# Altium PCB expansionBreakout.PcbDoc
Units mil, origin at the board's own origin, x right, y up, seen from the top; angles counter-clockwise.
Board outline 1140 x 895 mil, 2 copper layers (Top Layer, Bottom Layer); 5 components, 12 nets, 34 pads, 6 vias.
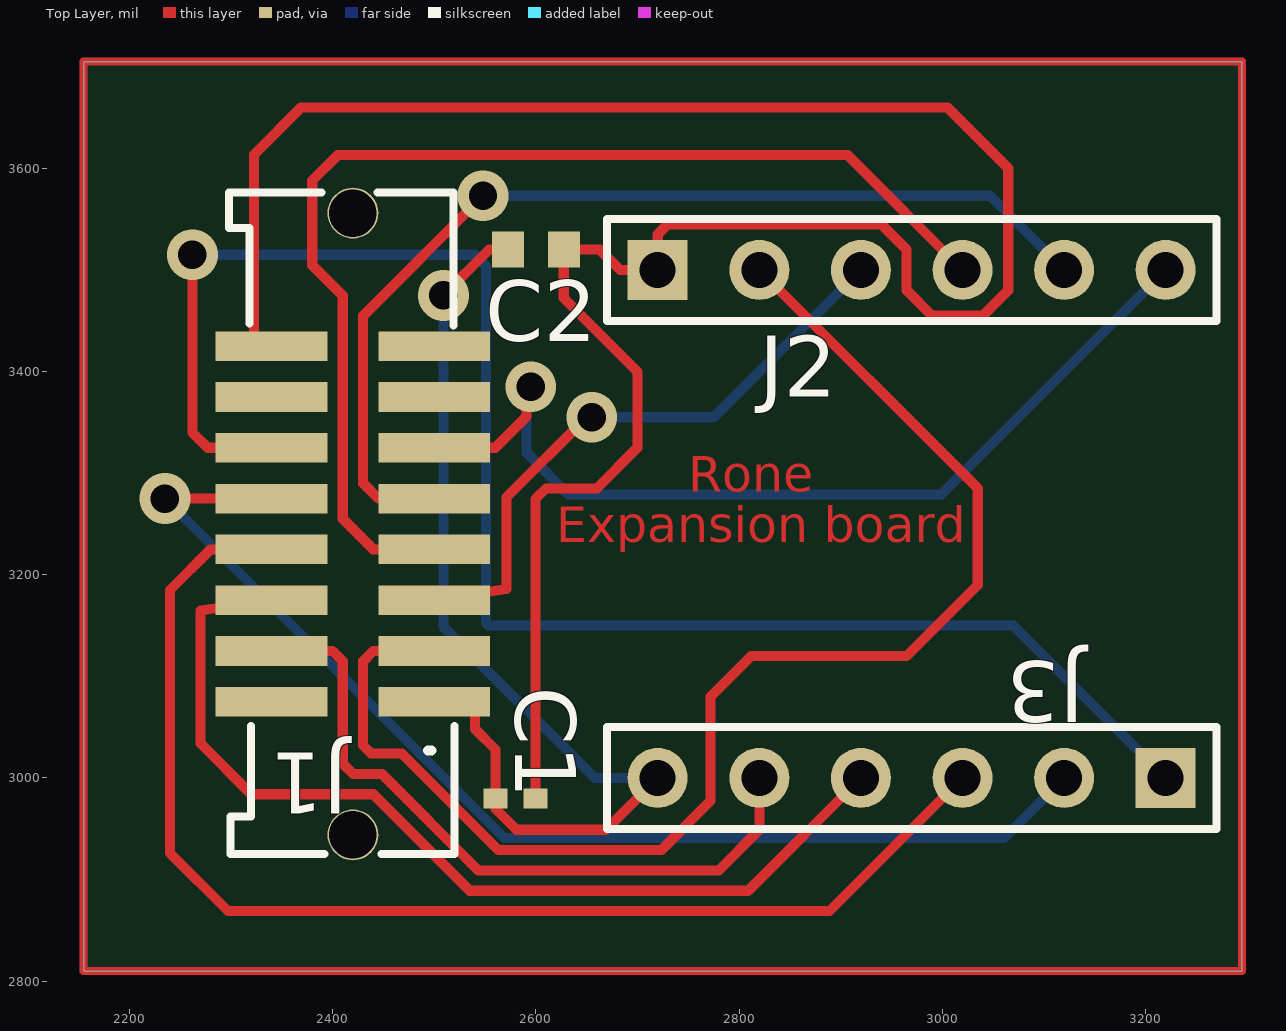
[diagram p0: Top Layer view]
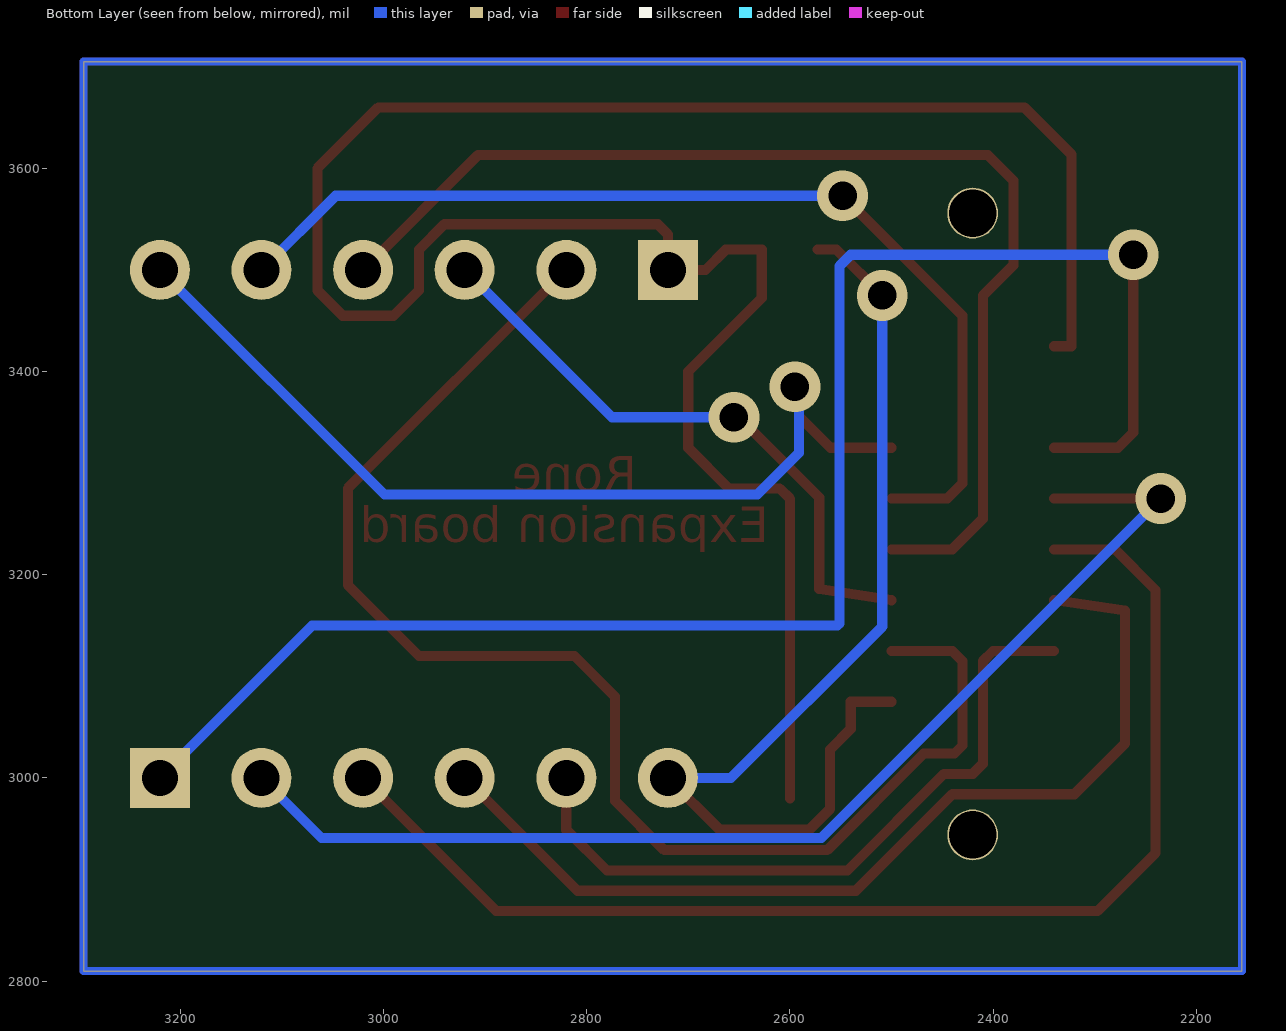
[diagram p1: Bottom Layer view, seen from below]

## Layer stack, top to bottom
Top Layer: signal copper 1.4
Dielectric: dielectric 12.6, FR-4, Dk 4.8
Bottom Layer: signal copper 1.4

## Board outline
2155,2810 2155,3705 3295,3705 3295,2810

## Design rules (kind name [scope] priority, off if disabled: settings)
Clearance [All] p1: gap=10
PolygonConnect [All] p1: connectstyle=Relief reliefconductorwidth=10 reliefentries=4 polygonreliefangle="90 Angle"
RoutingVias [All] p1: holewidth=28 width=50 viastyle="Through Hole" minholewidth=28 minwidth=50 maxholewidth=28 maxwidth=50
SilkscreenOverComponentPads [All] p1: minsilkscreentomaskgap=10
SolderMaskExpansion [All] p1: expansion=4
Width [All] p1: maxlimit=10 minlimit=10 preferedwidth=10
27 further rules are at their usual default settings.

## Components (designator, comment, footprint, x,y, rotation, side; value= is the part's Value field where it differs from the comment)
C1 "" CAPC1005L 2580,2980 r180 top
C2 "Cap Semi" CAPC1608L 2600,3520 r180 top
J1 "header" "HEADERSM 8X2" 2420,3250 r180 top
J2 "BOTTOM" HDR1X6 2720,3500 r0 top
J3 "TOP" HDR1X6 3220,3000 r180 top

## Footprints (in the part's own frame and the unit in brackets; to place one, negate y for a bottom-side part, rotate by r counter-clockwise, add the part's x,y. Pads: shape width x height; smd on the part's side, far side on the other; paste and mask are expansions set on the pad)
CAPC1005L [mm] "Chip Capacitor, Body 1.0x0.5mm, IPC High Density"
  rect 0.6x0.5 smd: 1(-0.5,0) 2(0.5,0)
  body extent -0.55,-0.3 0.55,0.3, height 1.3
CAPC1608L [mm] "Chip Capacitor, Body 1.6x0.8mm, IPC High Density"
  rect 0.8x0.9 smd: 1(-0.7,0) 2(0.7,0)
  body extent -0.87,-0.48 0.87,0.48, height 1.3
HDR1X6 [mm] "Connector; Header; 6 Position"
  rect 1.5x1.5 hole 0.9: 1(0,0)
  round 1.5 hole 0.9: 2(2.54,0) 3(5.08,0) 4(7.62,0) 5(10.16,0) 6(12.7,0)
  silkscreen extent -1.27,-1.27 13.97,1.27
"HEADERSM 8X2" [mm]
  rect 2.795x0.74 smd: 1(-2.033,4.445) 2(2.033,4.445) 3(-2.033,3.175) 4(2.033,3.175) 5(-2.033,1.905) 6(2.033,1.905) 7(-2.033,0.635) 8(2.033,0.635) 9(-2.033,-0.635) 10(2.033,-0.635) 11(-2.033,-1.905) 12(2.033,-1.905) 13(-2.033,-3.175) 14(2.033,-3.175) 15(-2.033,-4.445) 16(2.033,-4.445)
  round 1.27 hole 1.19: c1(0,7.773) c2(0,-7.773)
  silkscreen extent -2.54,-8.29 3.1,8.25

## Part data
C1: library part Cap, "Capacitor"
C2: "Capacitor (Semiconductor SIM Model)"
J1: library part "HEADER 8X2"
J2 J3: library part "Header 6", "Header, 6-Pin"

## Via types
v1: diameter 50, hole 28, Top Layer to Bottom Layer, 6 vias

## Nets (pads, with @x,y where several pads share a name; then routed paths per layer and width w, separated by ;. In a path a pad name is that pad's centre, name@x,y a point inside that pad or via, vN(x,y) a via of type N, cw(c..) or ccw(c..) an arc to the next point about the centre after c; other vN are vias at no path point)
3.3V: C1.2 C2.2 J1.1 J3.6 | length 1023.9
  Top Layer w10: J1.1 2540,3075 2540,3048.31 2560.31,3028 C1.2 2560.31,2969.69 2581,2949 2669,2949 J3.6 ; v1(2509,3475) 2554,3520 C2.2
  Bottom Layer w10: v1(2509,3475) 2509,3149 2658,3000 J3.6
ADC_EXPAND: J1.11 J2.6 | length 917.3
  Top Layer w10: J1.11 2560,3325 2591,3356 v1@2591,3376
  Bottom Layer w10: v1@2591,3376 2591,3320 2632,3279 2999,3279 J2.6
  other v1: 2595,3385
FTDI_RX: J1.5 J2.3 | length 603.6
  Top Layer w10: J1.5 2571,3186 2571,3276 v1@2650,3355
  Bottom Layer w10: v1@2650,3355 2775,3355 J2.3
  other v1: 2655,3355
FTDI_TX: J1.7 J2.4 | length 1145
  Top Layer w10: J1.7 2440,3225 2410,3255 2410,3474.57 2380,3504.57 2380,3588 2405,3613 2907,3613 J2.4
GND: C1.1 C2.1 J1.16 J2.1 | length 2309.1
  Top Layer w10: J1.16 2322.63,3425 2322.63,3613.48 2369.15,3660 3005,3660 3065,3600 3065,3480 3040,3455 2990,3455 2965,3480 2965,3520 2940,3545 2730,3545 2720,3535 J2.1 2683,3500 2663,3520 C2.1 2627.56,3472.44 2700,3400 2700,3325 2659.99,3284.99 2610,3284.99 2599.69,3274.67 C1.1
RESET: J1.3 J2.2 | length 1372
  Top Layer w10: J1.3 2440,3125 2430,3115 2430,3032 2437.93,3024.07 2468.19,3024.07 2563.26,2929 2723.5,2929 2772,2977.5 2772,3080 2812,3120 2965,3120 3035,3190 3035,3285 J2.2
SPI_CLK: J1.4 J3.5 | length 696.2
  Top Layer w10: J1.4 2400,3125 2410,3115 2410,3014 2420,3004 2448.29,3004 2543.29,2909 2780,2909 2820,2949 J3.5
SPI_MISO: J1.6 J3.4 | length 957.8
  Top Layer w10: J1.6 2269.96,3164.96 2269.96,3034.04 2320,2984 2440,2984 2535,2889 2809,2889 J3.4
SPI_MOSI: J1.8 J3.3 | length 1233.4
  Top Layer w10: J1.8 2280,3225 2240,3185 2240,2926 2297,2869 2889,2869 J3.3
SPI_SEL_EXPAND0: J1.10 J3.2 | length 1152.8
  Top Layer w10: v1(2235,3275) J1.10
  Bottom Layer w10: v1(2235,3275) 2569,2941 3061,2941 J3.2
SPI_SEL_EXPAND1: J1.12 J3.1 | length 1636.7
  Top Layer w10: v1(2262,3515) 2262,3340 2277,3325 J1.12
  Bottom Layer w10: v1(2262,3515) 2540,3515 2551,3504 2551,3152 2553,3150 3070,3150 J3.1
VBAT: J1.9 J2.5 | length 1010.3
  Top Layer w10: J1.9 2445,3275 2430,3290 2430,3455 v1(2548,3573)
  Bottom Layer w10: v1(2548,3573) 3047,3573 J2.5
pads on no net: J1.2 J1.13 J1.14 J1.15 J1.c1 J1.c2

## Other copper
Top Layer:
  text "Rone" at 2750,3270 h60
  text "Expansion board" at 2620,3220 h60
Multi-Layer:
  the board outline again, w7.87